# Altium PCB FPW1-0-2.PcbDoc (part 3 of 11)
Units mm, origin at the board's own origin, x right, y up, seen from the top; angles counter-clockwise.
Board outline 85 x 56 mm, 4 copper layers (Top Layer, GND_Plane, 3V3_Plane, Bottom Layer); 182 components, 321 nets, 1106 pads, 360 vias.
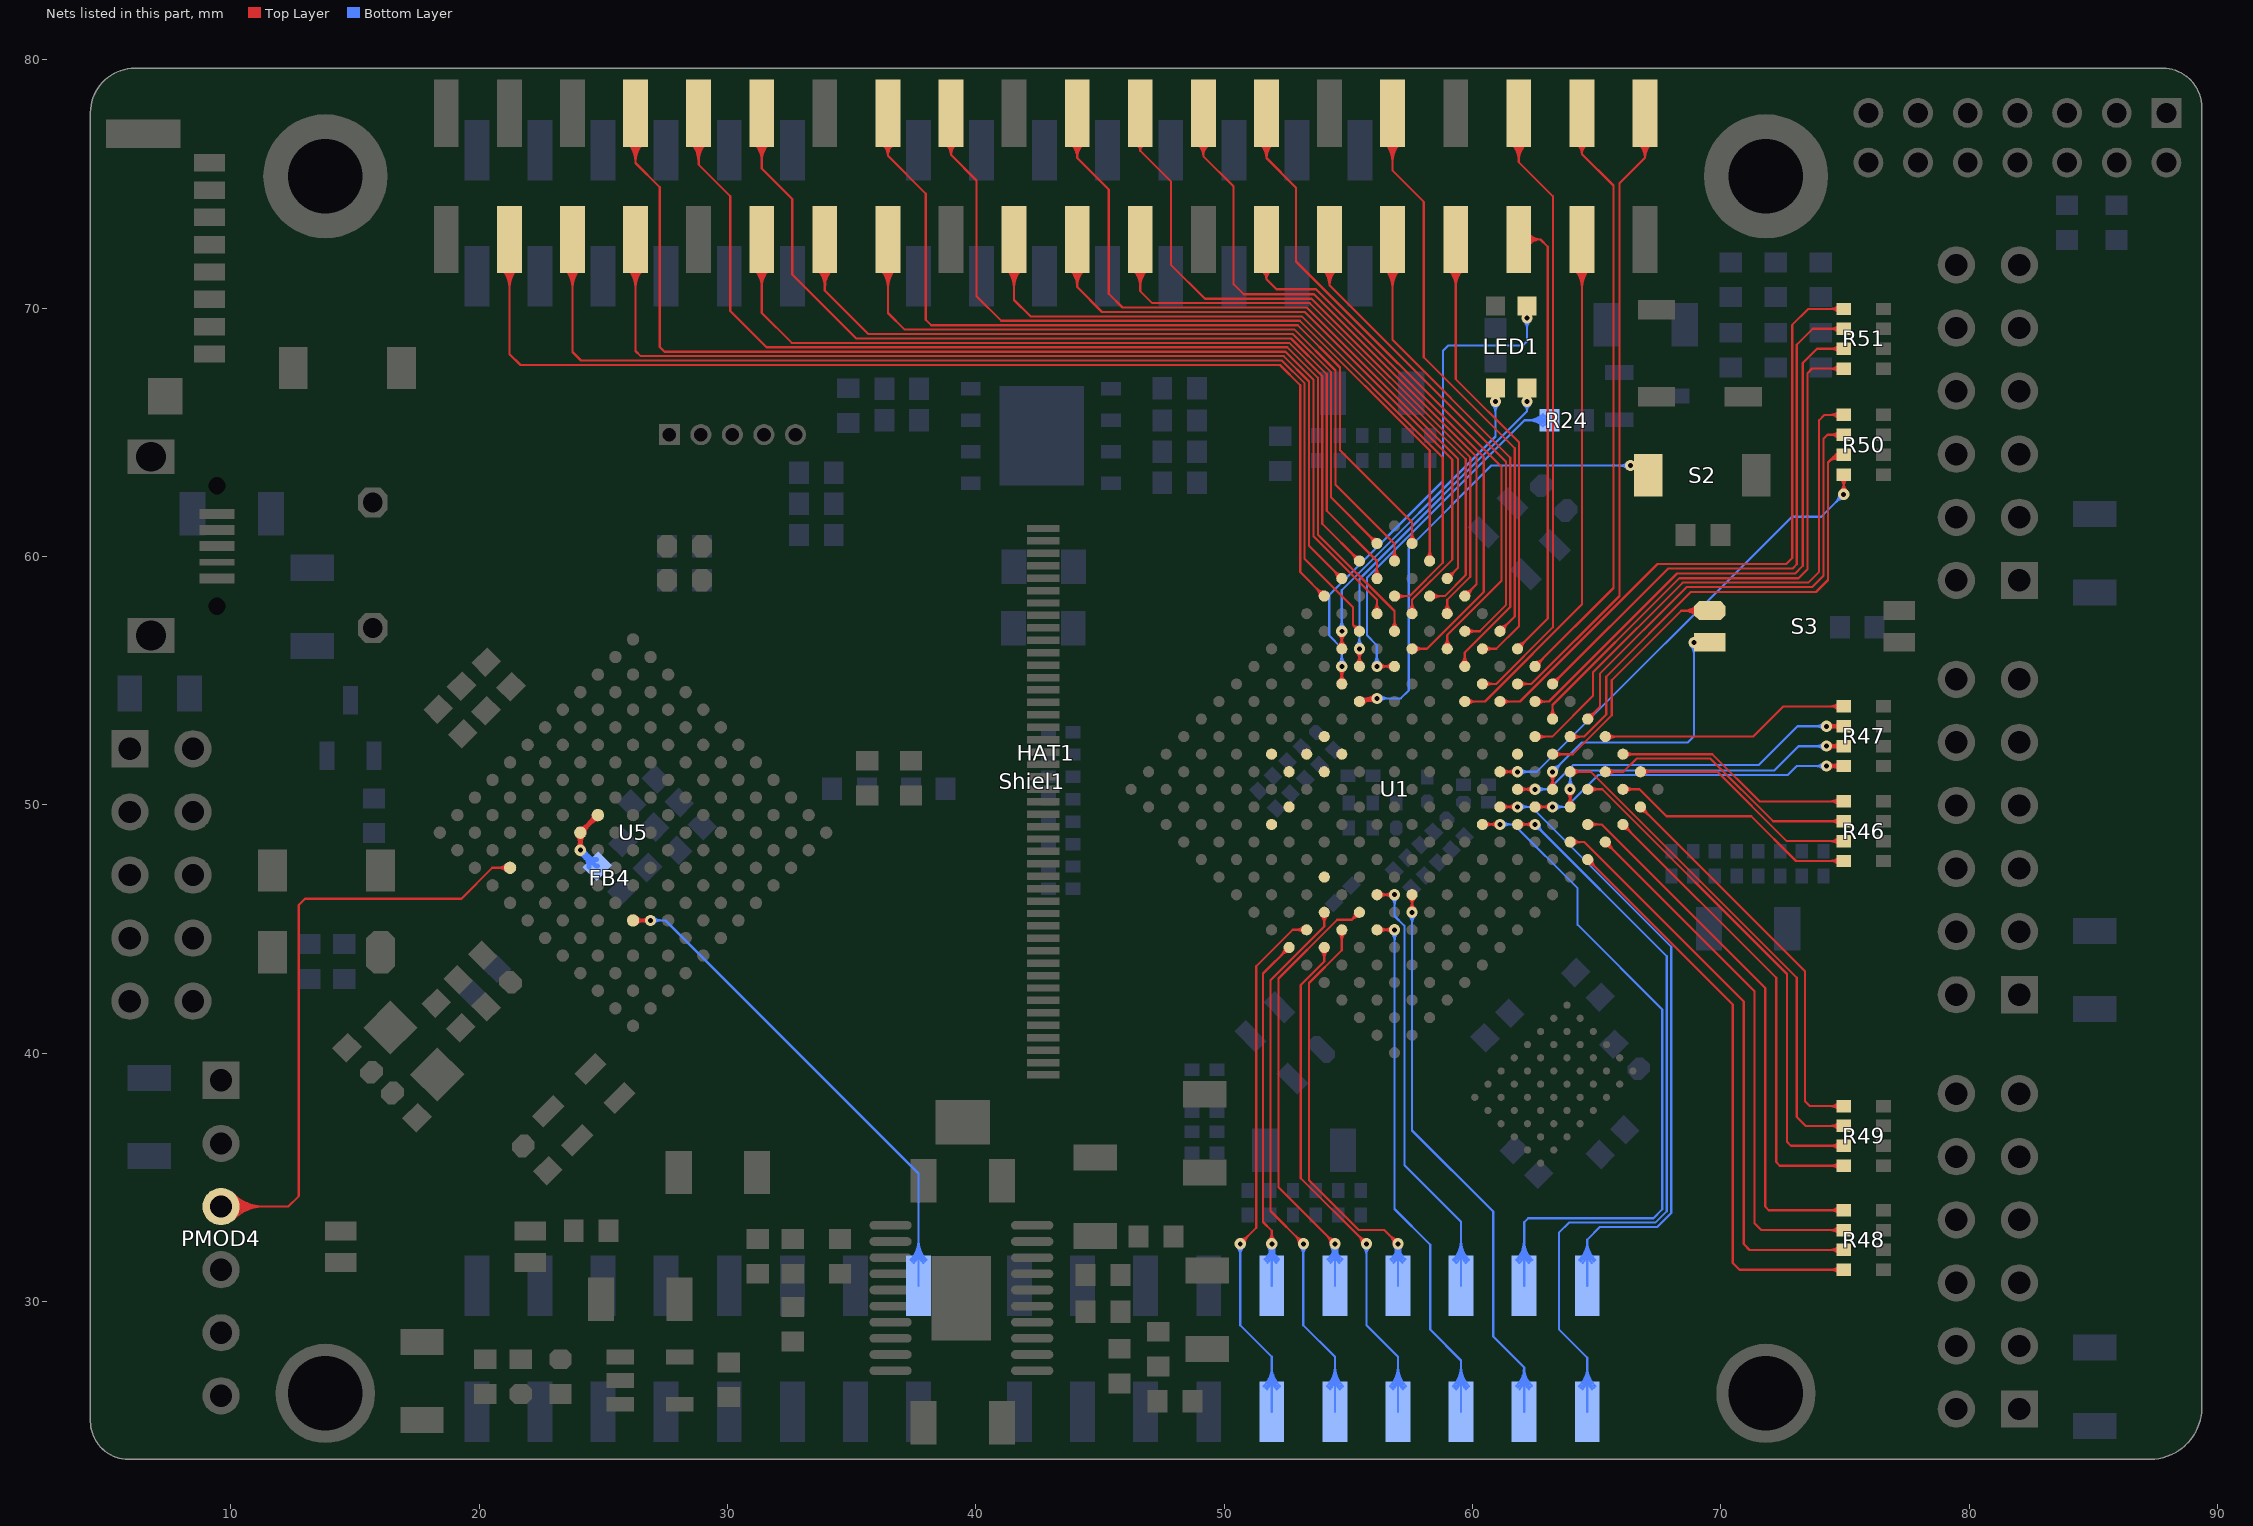
[diagram p5: the nets of this part, all layers, seen from the top]

## Via types
v1: diameter 0.45, hole 0.2, Top Layer to Bottom Layer, tented both sides, 280 vias
v2: diameter 0.61, hole 0.33, Top Layer to Bottom Layer, tented both sides, 40 vias
v3: diameter 0.403, hole 0.2, Top Layer to Bottom Layer, tented both sides, 15 vias
v4: diameter 0.5, hole 0.2, Top Layer to Bottom Layer, tented both sides, 12 vias
v5: diameter 0.864, hole 0.508, Top Layer to Bottom Layer, tented both sides, 11 vias
v6: diameter 0.864, hole 0.356, Top Layer to Bottom Layer, tented both sides, 1 vias
v7: diameter 0.864, hole 0.381, Top Layer to Bottom Layer, tented both sides, 1 vias

## Nets (pads, with @x,y where several pads share a name; then routed paths per layer and width w, separated by ;. In a path a pad name is that pad's centre, name@x,y a point inside that pad or via, vN(x,y) a via of type N, cw(c..) or ccw(c..) an arc to the next point about the centre after c; other vN are vias at no path point) (continued)
ANALOG13: PMOD4.3 U5.L4 | length 35.4
  Top Layer w0.089: PMOD4.3@9.614,33.833 12.319,33.833 12.738,34.252 12.738,45.974 12.992,46.228 19.291,46.228 20.536,47.473 U5.L4@21.25,47.473 ; PMOD4.3@9.861,33.585 cw(c10.459,32.988) 10.459,33.833 cw(c10.459,34.678) PMOD4.3@9.861,34.08 ; PMOD4.3@9.924,33.522 cw(c10.673,32.773) 10.673,33.833 cw(c10.673,34.892) PMOD4.3@9.924,34.143 ; PMOD4.3@9.987,33.46 cw(c10.888,32.559) 10.888,33.833 cw(c10.888,35.107) PMOD4.3@9.987,34.206 ; PMOD4.3@10.05,33.397 cw(c11.103,32.344) 11.103,33.833 cw(c11.103,35.322) PMOD4.3@10.05,34.269 ; PMOD4.3@10.113,33.334 cw(c11.317,32.129) 11.317,33.833 cw(c11.317,35.536) PMOD4.3@10.113,34.332 ; U5.L4@21.104,47.327 ccw(c20.753,46.976) 20.753,47.473 ccw(c20.753,47.969) U5.L4@21.104,47.618 ; U5.L4@21.167,47.39 ccw(c20.968,47.191) 20.968,47.473 ccw(c20.968,47.754) U5.L4@21.167,47.555
AVDD: FB4.2 U5.G5 U5.H5 | length 7.2
  Top Layer w0.203: U5.H5@23.973,48.782 cw(c23.72,48.529) 24.078,48.529 cw(c24.436,48.529) U5.H5@24.183,48.782 ; v1@23.991,48.267 ccw(c23.78,48.478) 24.078,48.478 ccw(c24.376,48.478) v1@24.165,48.267 ; v1(24.078,48.18) U5.H5@24.078,48.887 U5.G5@24.785,49.594 ; U5.H5@24.078,49.035 ccw(c24.078,49.393) 24.331,49.14 ccw(c24.585,48.887) U5.H5@24.226,48.887 ; U5.G5@24.637,49.594 cw(c24.278,49.594) 24.532,49.341 cw(c24.785,49.087) U5.G5@24.785,49.446
  Bottom Layer w0.203: v1@24.046,48.061 cw(c23.929,47.624) 24.321,47.85 ; v1@24.078,48.056 cw(c24.078,47.758) 24.289,47.969 cw(c24.499,48.18) v1@24.201,48.18 ; v1(24.078,48.18) 24.722,47.536 FB4.2@24.765,47.536 ; v1@24.197,48.212 ccw(c24.713,48.35) 24.446,47.887 ; v1@24.201,48.056 cw(c23.645,47.5) FB4.2@24.432,47.5 ; 24.267,47.991 ccw(c24.73,48.453) FB4.2@24.73,47.799
BANK14_IO1: S2.1 U1.K12 | length 23
  Top Layer w0.089: U1.K12@55.444,54.166 55.571,54.292 v1(56.147,54.292) ccw(c56.147,53.516) U1.K12@55.577,54.043 ; U1.K12@55.446,54.164 cw(c55.74,53.892) 55.74,54.292 ; U1.K12@55.511,54.104 cw(c55.943,53.704) v1@55.943,54.292 ; 55.753,54.244 cw(c55.819,53.983) v1@56.016,54.168 ; 55.829,54.264 ccw(c55.763,54.521) v1@55.992,54.385 ; 55.9,54.282 cw(c55.946,54.102) v1@56.08,54.229 ; v1@55.985,54.373 cw(c55.666,54.534) 55.758,54.188 cw(c55.851,53.843) v1@56.047,54.142 ; v1@56.019,54.165 ccw(c55.711,53.857) 55.711,54.292 ccw(c55.711,54.728) v1@56.019,54.42
  Bottom Layer w0.089: v1(56.147,54.292) 57.112,54.292 57.429,54.61 57.429,60.338 60.757,63.665 v1(66.358,63.665) ; v1@56.274,54.165 cw(c56.583,53.857) 56.583,54.292 cw(c56.583,54.728) v1@56.274,54.42 ; v1@66.23,63.537 ccw(c65.922,63.229) 65.922,63.665 ccw(c65.922,64.101) v1@66.23,63.793
BANK14_IO2: LED1.3 U1.L14 | length 15.3
  Top Layer w0.089: U1.L14@54.609,56.415 ccw(c54.301,56.723) 54.737,56.723 ccw(c55.173,56.723) U1.L14@54.865,56.415 ; v1@54.609,56.867 cw(c54.301,56.558) 54.737,56.558 cw(c55.173,56.558) v1@54.865,56.867 ; U1.L14@54.737,56.287 v1(54.737,56.994)
  Bottom Layer w0.089: v1@54.609,57.122 ccw(c54.301,57.43) 54.737,57.43 ccw(c55.173,57.43) v1@54.865,57.122 ; v1(54.737,56.994) 54.737,58.649 60.922,64.834 v1(60.922,66.243) ; v1@60.794,66.116 cw(c60.486,65.807) 60.922,65.807 cw(c61.358,65.807) v1@61.05,66.116
BANK14_IO3: HAT1.5 U1.M14 | length 50.1
  Top Layer w0.089: HAT1.5@23.44,71.599 cw(c22.662,70.821) 23.762,70.821 cw(c24.862,70.821) HAT1.5@24.084,71.599 ; HAT1.5@23.503,71.662 cw(c22.877,71.036) 23.762,71.036 cw(c24.647,71.036) HAT1.5@24.021,71.662 ; HAT1.5@23.565,71.725 cw(c23.091,71.25) 23.762,71.25 cw(c24.432,71.25) HAT1.5@23.958,71.725 ; HAT1.5@23.762,72.771 23.762,68.237 24.105,67.894 52.321,67.894 53.238,66.977 53.238,59.906 53.34,59.804 ; 53.34,59.817 53.34,59.804 ; U1.M14@55.265,57.017 ccw(c54.982,57.053) 55.184,57.255 ; U1.M14@55.421,57.173 cw(c55.385,57.456) 55.184,57.255 ; U1.M14@55.444,56.994 55.184,57.255 ; 53.34,59.804 55.184,57.961 55.184,57.255
BANK14_IO4: LED1.1 U1.K13 | length 22.7
  Top Layer w0.089: U1.K13@54.609,55.001 ccw(c54.301,55.309) 54.737,55.309 ccw(c55.173,55.309) U1.K13@54.865,55.001 ; v1@54.609,55.452 cw(c54.301,55.144) 54.737,55.144 cw(c55.173,55.144) v1@54.865,55.452 ; U1.K13@54.737,54.873 v1(54.737,55.58)
  Bottom Layer w0.089: v1@54.609,55.708 ccw(c54.301,56.016) 54.737,56.016 ccw(c55.173,56.016) v1@54.865,55.708 ; v1(54.737,55.58) 54.737,56.312 54.229,56.82 54.229,58.458 58.814,63.043 58.814,68.288 59.03,68.504 62.027,68.504 62.192,68.669 v1(62.192,69.609) ; v1@62.064,69.481 cw(c61.756,69.173) 62.192,69.173 cw(c62.628,69.173) v1@62.32,69.481
BANK14_IO5: LED1.4 U1.L13 | length 16.1
  Top Layer w0.089: U1.L13@55.316,55.708 ccw(c55.008,56.016) 55.444,56.016 ccw(c55.88,56.016) U1.L13@55.572,55.708 ; v1@55.316,56.16 cw(c55.008,55.851) 55.444,55.851 cw(c55.88,55.851) v1@55.572,56.16 ; U1.L13@55.444,55.58 v1(55.444,56.287)
  Bottom Layer w0.089: v1@55.316,56.415 ccw(c55.008,56.723) 55.444,56.723 ccw(c55.88,56.723) v1@55.572,56.415 ; v1(55.444,56.287) 55.444,59.099 62.192,65.847 ; v1@62.073,66.107 cw(c61.847,65.847) 62.192,65.847 ; v1(62.192,66.243) 62.192,65.847 ; v1@62.31,66.107 ccw(c62.536,65.847) 62.192,65.847
BANK14_IO6: R24.2 U1.M12 | length 19.5
  Top Layer w0.089: v1(56.147,55.58) U1.M12@56.858,55.58 ; v1@56.274,55.452 cw(c56.583,55.144) 56.583,55.58 cw(c56.583,56.016) v1@56.274,55.708 ; U1.M12@56.731,55.452 ccw(c56.422,55.144) 56.422,55.58 ccw(c56.422,56.016) U1.M12@56.731,55.708
  Bottom Layer w0.089: v1@56.019,55.708 ccw(c55.711,56.016) 56.147,56.016 ccw(c56.583,56.016) v1@56.274,55.708 ; v1(56.147,55.58) 56.147,56.434 55.75,56.83 55.75,59.154 62.09,65.494 R24.2@63.092,65.494 ; R24.2@62.841,65.242 ccw(c62.234,64.636) 62.234,65.494 ccw(c62.234,66.352) R24.2@62.841,65.745 ; R24.2@62.904,65.305 ccw(c62.448,64.85) 62.448,65.494 ccw(c62.448,66.138) R24.2@62.904,65.682 ; R24.2@62.966,65.368 ccw(c62.663,65.065) 62.663,65.494 ccw(c62.663,65.923) R24.2@62.966,65.62
BANK14_IO7: HAT1.3 U1.M16 | length 50.7
  Top Layer w0.089: HAT1.3@20.9,71.599 cw(c20.122,70.821) 21.222,70.821 cw(c22.322,70.821) HAT1.3@21.544,71.599 ; HAT1.3@20.963,71.662 cw(c20.337,71.036) 21.222,71.036 cw(c22.107,71.036) HAT1.3@21.481,71.662 ; HAT1.3@21.025,71.725 cw(c20.551,71.25) 21.222,71.25 cw(c21.892,71.25) HAT1.3@21.418,71.725 ; HAT1.3@21.222,72.771 21.222,68.161 21.666,67.716 52.248,67.716 53.061,66.904 53.061,59.378 U1.M16@54.03,58.409 ; U1.M16@53.849,58.409 ccw(c53.413,58.409) 53.722,58.717 ccw(c54.03,59.025) U1.M16@54.03,58.589
BANK14_IO8: HAT1.7 U1.N16 | length 45.5
  Top Layer w0.089: HAT1.7@25.98,71.599 cw(c25.202,70.821) 26.302,70.821 cw(c27.402,70.821) HAT1.7@26.624,71.599 ; HAT1.7@26.043,71.662 cw(c25.417,71.036) 26.302,71.036 cw(c27.187,71.036) HAT1.7@26.561,71.662 ; HAT1.7@26.105,71.725 cw(c25.631,71.25) 26.302,71.25 cw(c26.972,71.25) HAT1.7@26.498,71.725 ; HAT1.7@26.302,72.771 26.302,68.275 26.505,68.072 52.395,68.072 53.416,67.051 53.416,60.436 U1.N16@54.737,59.116 ; U1.N16@54.556,59.116 ccw(c54.121,59.116) 54.429,59.424 ccw(c54.737,59.732) U1.N16@54.737,59.296
BANK14_IO9: HAT1.12 U1.P15 | length 44.1
  Top Layer w0.089: HAT1.12@31.06,76.679 cw(c30.282,75.901) 31.382,75.901 cw(c32.482,75.901) HAT1.12@31.704,76.679 ; HAT1.12@31.123,76.742 cw(c30.497,76.116) 31.382,76.116 cw(c32.267,76.116) HAT1.12@31.641,76.742 ; HAT1.12@31.185,76.805 cw(c30.711,76.33) 31.382,76.33 cw(c32.052,76.33) HAT1.12@31.578,76.805 ; HAT1.12@31.382,77.851 31.382,75.628 32.614,74.397 32.614,71.361 35.192,68.783 52.69,68.783 54.127,67.345 54.127,61.849 56.151,59.825 U1.P15@56.151,59.116 ; U1.P15@56.024,59.243 ccw(c55.715,59.552) 56.151,59.552 ccw(c56.587,59.552) U1.P15@56.279,59.243
BANK14_IO10: HAT1.11 U1.P16 | length 39.5
  Top Layer w0.089: HAT1.11@31.06,71.599 cw(c30.282,70.821) 31.382,70.821 cw(c32.482,70.821) HAT1.11@31.704,71.599 ; HAT1.11@31.123,71.662 cw(c30.497,71.036) 31.382,71.036 cw(c32.267,71.036) HAT1.11@31.641,71.662 ; HAT1.11@31.185,71.725 cw(c30.711,71.25) 31.382,71.25 cw(c32.052,71.25) HAT1.11@31.578,71.725 ; HAT1.11@31.382,72.771 31.382,69.812 32.588,68.605 52.616,68.605 53.95,67.272 53.95,61.317 U1.P16@55.444,59.823 ; U1.P16@55.264,59.823 ccw(c54.828,59.823) 55.136,60.131 ccw(c55.444,60.439) U1.P16@55.444,60.003
BANK14_IO11: HAT1.15 U1.R15 | length 35.5
  Top Layer w0.089: HAT1.15@36.14,71.599 cw(c35.362,70.821) 36.462,70.821 cw(c37.562,70.821) HAT1.15@36.784,71.599 ; HAT1.15@36.203,71.662 cw(c35.577,71.036) 36.462,71.036 cw(c37.347,71.036) HAT1.15@36.721,71.662 ; HAT1.15@36.265,71.725 cw(c35.791,71.25) 36.462,71.25 cw(c37.132,71.25) HAT1.15@36.658,71.725 ; HAT1.15@36.462,72.771 36.462,69.812 37.135,69.139 52.837,69.139 54.483,67.493 54.483,62.89 56.858,60.515 U1.R15@56.858,59.823 ; U1.R15@56.731,59.95 ccw(c56.422,60.259) 56.858,60.259 ccw(c57.294,60.259) U1.R15@56.986,59.95
BANK14_IO12: HAT1.13 U1.R16 | length 36.3
  Top Layer w0.089: HAT1.13@33.6,71.599 cw(c32.822,70.821) 33.922,70.821 cw(c35.022,70.821) HAT1.13@34.244,71.599 ; HAT1.13@33.663,71.662 cw(c33.037,71.036) 33.922,71.036 cw(c34.807,71.036) HAT1.13@34.181,71.662 ; HAT1.13@33.725,71.725 cw(c33.251,71.25) 33.922,71.25 cw(c34.592,71.25) HAT1.13@34.118,71.725 ; HAT1.13@33.922,72.771 33.922,70.714 35.674,68.961 52.763,68.961 54.305,67.419 54.305,62.376 U1.R16@56.151,60.53 ; U1.R16@55.971,60.53 ccw(c55.535,60.53) 55.843,60.838 ccw(c56.151,61.146) U1.R16@56.151,60.71
BANK14_IO13: HAT1.18 U1.T14 | length 36.3
  Top Layer w0.089: HAT1.18@38.759,76.616 cw(c38.48,76.175) 39.002,76.175 ; HAT1.18@38.806,76.691 cw(c38.582,76.336) 39.002,76.336 cw(c39.422,76.336) HAT1.18@39.198,76.691 ; HAT1.18@38.853,76.766 cw(c38.684,76.497) 39.002,76.497 cw(c39.32,76.497) HAT1.18@39.15,76.766 ; HAT1.18@39.002,77.851 39.002,76.175 ; HAT1.18@39.245,76.616 ccw(c39.524,76.175) 39.002,76.175 ; U1.T14@58.145,59.95 ccw(c57.837,60.259) 58.273,60.259 ccw(c58.708,60.259) U1.T14@58.4,59.95 ; U1.T14@58.273,59.823 58.273,64.27 53.048,69.494 41.021,69.494 40.03,70.485 40.03,75.146 39.002,76.175
BANK14_IO14: HAT1.16 U1.T15 | length 38.2
  Top Layer w0.089: HAT1.16@36.204,76.625 cw(c35.869,76.136) 36.462,76.136 ; HAT1.16@36.254,76.699 cw(c35.985,76.305) 36.462,76.305 cw(c36.939,76.305) HAT1.16@36.669,76.699 ; HAT1.16@36.305,76.772 cw(c36.1,76.474) 36.462,76.474 cw(c36.823,76.474) HAT1.16@36.619,76.772 ; HAT1.16@36.462,77.851 36.462,76.136 ; HAT1.16@36.719,76.625 ccw(c37.054,76.136) 36.462,76.136 ; U1.T15@57.438,60.658 ccw(c57.13,60.966) 57.565,60.966 ccw(c58.001,60.966) U1.T15@57.693,60.658 ; U1.T15@57.565,60.53 57.565,61.383 54.661,64.287 54.661,67.615 52.959,69.317 38.202,69.317 37.986,69.532 37.986,74.612 36.462,76.136
BANK14_IO15: HAT1.10 U1.N13 | length 49.6
  Top Layer w0.089: HAT1.10@28.52,76.679 cw(c27.742,75.901) 28.842,75.901 cw(c29.942,75.901) HAT1.10@29.164,76.679 ; HAT1.10@28.583,76.742 cw(c27.957,76.116) 28.842,76.116 cw(c29.727,76.116) HAT1.10@29.101,76.742 ; HAT1.10@28.645,76.805 cw(c28.171,76.33) 28.842,76.33 cw(c29.512,76.33) HAT1.10@29.038,76.805 ; HAT1.10@28.842,77.851 28.842,75.781 30.112,74.511 30.112,69.888 31.572,68.428 52.542,68.428 53.772,67.198 53.772,60.893 56.858,57.806 U1.N13@56.858,56.994 ; U1.N13@56.731,57.122 ccw(c56.422,57.43) 56.858,57.43 ccw(c57.294,57.43) U1.N13@56.986,57.122
BANK14_IO16: HAT1.21 U1.P13 | length 31.4
  Top Layer w0.089: HAT1.21@43.767,71.592 cw(c43.058,70.853) 44.082,70.853 ; HAT1.21@43.828,71.656 cw(c43.258,71.062) 44.082,71.062 cw(c44.906,71.062) HAT1.21@44.336,71.656 ; HAT1.21@43.89,71.72 cw(c43.458,71.27) 44.082,71.27 cw(c44.706,71.27) HAT1.21@44.274,71.72 ; HAT1.21@44.082,72.771 44.082,70.853 ; HAT1.21@44.397,71.592 ccw(c45.105,70.853) 44.082,70.853 ; U1.P13@57.438,57.829 ccw(c57.13,58.137) 57.565,58.137 ccw(c58.001,58.137) U1.P13@57.693,57.829 ; U1.P13@57.565,57.701 57.565,58.262 59.182,59.879 59.182,63.906 53.238,69.85 45.085,69.85 44.082,70.853
BANK14_IO17: HAT1.8 U1.N14 | length 52
  Top Layer w0.089: HAT1.8@25.98,76.679 cw(c25.202,75.901) 26.302,75.901 cw(c27.402,75.901) HAT1.8@26.624,76.679 ; HAT1.8@26.043,76.742 cw(c25.417,76.116) 26.302,76.116 cw(c27.187,76.116) HAT1.8@26.561,76.742 ; HAT1.8@26.105,76.805 cw(c25.631,76.33) 26.302,76.33 cw(c26.972,76.33) HAT1.8@26.498,76.805 ; HAT1.8@26.302,77.851 26.302,75.844 27.28,74.867 27.28,68.44 27.47,68.25 52.469,68.25 53.594,67.125 53.594,60.819 56.151,58.262 U1.N14@56.151,57.701 ; U1.N14@56.024,57.829 ccw(c55.715,58.137) 56.151,58.137 ccw(c56.587,58.137) U1.N14@56.279,57.829
BANK14_IO18: HAT1.19 U1.P14 | length 33.9
  Top Layer w0.089: HAT1.19@41.22,71.599 cw(c40.442,70.821) 41.542,70.821 cw(c42.642,70.821) HAT1.19@41.864,71.599 ; HAT1.19@41.283,71.662 cw(c40.657,71.036) 41.542,71.036 cw(c42.427,71.036) HAT1.19@41.801,71.662 ; HAT1.19@41.345,71.725 cw(c40.871,71.25) 41.542,71.25 cw(c42.212,71.25) HAT1.19@41.738,71.725 ; HAT1.19@41.542,72.771 41.542,70.333 42.202,69.672 53.122,69.672 58.801,63.993 58.801,59.749 57.46,58.409 U1.P14@56.858,58.409 ; U1.P14@56.986,58.281 cw(c57.294,57.973) 57.294,58.409 cw(c57.294,58.844) U1.P14@56.986,58.536
BANK14_IO19: HAT1.27 U1.N12 | length 24.8
  Top Layer w0.089: HAT1.27@51.492,71.517 cw(c51.312,71.171) 51.702,71.171 ; HAT1.27@51.533,71.596 cw(c51.388,71.317) 51.702,71.317 cw(c52.016,71.317) HAT1.27@51.871,71.596 ; HAT1.27@51.702,72.771 51.702,71.171 ; HAT1.27@51.912,71.517 ccw(c52.092,71.171) 51.702,71.171 ; U1.N12@57.565,56.287 58.167,56.287 60.452,58.572 60.452,64.008 53.696,70.764 52.108,70.764 51.702,71.171 ; U1.N12@57.693,56.16 cw(c58.001,55.851) 58.001,56.287 cw(c58.001,56.723) U1.N12@57.693,56.415
BANK14_IO20: HAT1.31 U1.P10 | length 24.8
  Top Layer w0.089: HAT1.31@56.46,71.599 cw(c55.682,70.821) 56.782,70.821 cw(c57.882,70.821) HAT1.31@57.104,71.599 ; HAT1.31@56.523,71.662 cw(c55.897,71.036) 56.782,71.036 cw(c57.667,71.036) HAT1.31@57.041,71.662 ; HAT1.31@56.585,71.725 cw(c56.111,71.25) 56.782,71.25 cw(c57.452,71.25) HAT1.31@56.978,71.725 ; HAT1.31@56.782,72.771 56.782,68.718 61.519,63.981 61.519,57.973 59.687,56.141 U1.P10@59.687,55.58 ; U1.P10@59.559,55.708 ccw(c59.251,56.016) 59.687,56.016 ccw(c60.123,56.016) U1.P10@59.814,55.708
BANK14_IO21: HAT1.28 U1.P11 | length 30.4
  Top Layer w0.089: HAT1.28@51.416,76.647 cw(c50.932,76.048) 51.702,76.048 ; HAT1.28@51.471,76.716 cw(c51.082,76.234) 51.702,76.234 cw(c52.321,76.234) HAT1.28@51.932,76.716 ; HAT1.28@51.527,76.785 cw(c51.232,76.42) 51.702,76.42 cw(c52.171,76.42) HAT1.28@51.876,76.785 ; HAT1.28@51.702,77.851 51.702,76.048 ; HAT1.28@51.988,76.647 ccw(c52.472,76.048) 51.702,76.048 ; U1.P11@58.852,56.415 ccw(c58.544,56.723) 58.98,56.723 ccw(c59.416,56.723) U1.P11@59.107,56.415 ; U1.P11@58.98,56.287 58.98,56.848 61.163,59.031 61.163,63.614 52.895,71.882 52.895,74.854 51.702,76.048
BANK14_IO22: HAT1.24 U1.R12 | length 30.3
  Top Layer w0.089: HAT1.24@46.459,76.575 cw(c46.369,76.34) 46.622,76.34 ; HAT1.24@46.491,76.658 cw(c46.419,76.469) 46.622,76.469 cw(c46.825,76.469) HAT1.24@46.752,76.658 ; HAT1.24@46.622,77.851 46.622,76.34 ; HAT1.24@46.784,76.575 ccw(c46.874,76.34) 46.622,76.34 ; U1.R12@58.852,57.829 ccw(c58.544,58.137) 58.98,58.137 ccw(c59.416,58.137) U1.R12@59.107,57.829 ; U1.R12@58.98,57.701 58.98,58.262 59.906,59.188 59.906,63.995 53.518,70.383 49.225,70.383 47.854,71.755 47.854,75.108 46.622,76.34
BANK14_IO23: HAT1.26 U1.T12 | length 29.4
  Top Layer w0.089: HAT1.26@48.9,76.628 cw(c48.545,76.124) 49.162,76.124 ; HAT1.26@48.951,76.701 cw(c48.665,76.295) 49.162,76.295 cw(c49.658,76.295) HAT1.26@49.373,76.701 ; HAT1.26@49.002,76.774 cw(c48.786,76.466) 49.162,76.466 cw(c49.538,76.466) HAT1.26@49.322,76.774 ; HAT1.26@49.162,77.851 49.162,76.124 ; HAT1.26@49.424,76.628 ccw(c49.779,76.124) 49.162,76.124 ; U1.T12@59.687,58.409 60.16,58.882 60.16,64.021 53.619,70.561 50.787,70.561 50.381,70.968 50.381,74.905 49.162,76.124 ; U1.T12@59.687,58.589 ccw(c59.687,59.025) 59.995,58.717 ccw(c60.303,58.409) U1.T12@59.867,58.409
BANK14_IO24: HAT1.23 U1.R13 | length 29.3
  Top Layer w0.089: HAT1.23@46.3,71.599 cw(c45.522,70.821) 46.622,70.821 cw(c47.722,70.821) HAT1.23@46.944,71.599 ; HAT1.23@46.363,71.662 cw(c45.737,71.036) 46.622,71.036 cw(c47.507,71.036) HAT1.23@46.881,71.662 ; HAT1.23@46.425,71.725 cw(c45.951,71.25) 46.622,71.25 cw(c47.292,71.25) HAT1.23@46.818,71.725 ; HAT1.23@46.622,72.771 46.622,70.688 47.104,70.206 53.442,70.206 59.728,63.919 59.728,59.262 58.875,58.409 U1.R13@58.273,58.409 ; U1.R13@58.4,58.281 cw(c58.708,57.973) 58.708,58.409 cw(c58.708,58.844) U1.R13@58.4,58.536
BANK14_IO25: HAT1.22 U1.T13 | length 33.6
  Top Layer w0.089: HAT1.22@43.796,76.647 cw(c43.312,76.048) 44.082,76.048 ; HAT1.22@43.851,76.716 cw(c43.462,76.234) 44.082,76.234 cw(c44.701,76.234) HAT1.22@44.312,76.716 ; HAT1.22@43.907,76.785 cw(c43.612,76.42) 44.082,76.42 cw(c44.551,76.42) HAT1.22@44.256,76.785 ; HAT1.22@44.082,77.851 44.082,76.048 ; HAT1.22@44.368,76.647 ccw(c44.852,76.048) 44.082,76.048 ; U1.T13@58.98,59.116 59.411,59.547 59.411,63.944 53.327,70.028 45.91,70.028 45.352,70.587 45.352,74.778 44.082,76.048 ; U1.T13@58.98,59.296 ccw(c58.98,59.732) 59.288,59.424 ccw(c59.596,59.116) U1.T13@59.16,59.116
BANK14_IO26: HAT1.33 U1.R10 | length 23.3
  Top Layer w0.089: HAT1.33@59,71.599 cw(c58.222,70.821) 59.322,70.821 cw(c60.422,70.821) HAT1.33@59.644,71.599 ; HAT1.33@59.063,71.662 cw(c58.437,71.036) 59.322,71.036 cw(c60.207,71.036) HAT1.33@59.581,71.662 ; HAT1.33@59.125,71.725 cw(c58.651,71.25) 59.322,71.25 cw(c59.992,71.25) HAT1.33@59.518,71.725 ; HAT1.33@59.322,72.771 59.322,67.145 61.874,64.592 61.874,57.207 60.955,56.287 U1.R10@60.394,56.287 ; U1.R10@60.522,56.16 cw(c60.83,55.851) 60.83,56.287 cw(c60.83,56.723) U1.R10@60.522,56.415
BANK14_IO27: HAT1.29 U1.R11 | length 24
  Top Layer w0.089: HAT1.29@53.945,71.575 cw(c53.39,70.929) 54.242,70.929 ; HAT1.29@54.003,71.643 cw(c53.557,71.123) 54.242,71.123 cw(c54.927,71.123) HAT1.29@54.481,71.643 ; HAT1.29@54.061,71.71 cw(c53.723,71.316) 54.242,71.316 cw(c54.761,71.316) HAT1.29@54.423,71.71 ; HAT1.29@54.242,72.771 54.242,70.929 ; HAT1.29@54.539,71.575 ccw(c55.093,70.929) 54.242,70.929 ; U1.R11@59.687,56.994 60.289,56.994 61.341,58.046 61.341,63.83 54.242,70.929 ; U1.R11@59.814,56.867 cw(c60.123,56.558) 60.123,56.994 cw(c60.123,57.43) U1.R11@59.814,57.122
BANK14_IO28: HAT1.37 U1.N9 | length 25.9
  Top Layer w0.089: U1.N9@59.687,54.166 60.499,54.166 64.402,58.069 HAT1.37@64.402,72.771 ; U1.N9@59.814,54.038 cw(c60.123,53.73) 60.123,54.166 cw(c60.123,54.602) U1.N9@59.814,54.294 ; HAT1.37@64.08,71.599 cw(c63.302,70.821) 64.402,70.821 cw(c65.502,70.821) HAT1.37@64.724,71.599 ; HAT1.37@64.143,71.662 cw(c63.517,71.036) 64.402,71.036 cw(c65.287,71.036) HAT1.37@64.661,71.662 ; HAT1.37@64.205,71.725 cw(c63.731,71.25) 64.402,71.25 cw(c65.072,71.25) HAT1.37@64.598,71.725
BANK14_IO29: HAT1.36 U1.P9 | length 29.9
  Top Layer w0.089: U1.P9@60.394,54.873 60.955,54.873 63.233,57.152 63.233,74.511 61.862,75.882 HAT1.36@61.862,77.851 ; U1.P9@60.522,54.745 cw(c60.83,54.437) 60.83,54.873 cw(c60.83,55.309) U1.P9@60.522,55.001 ; HAT1.36@61.54,76.679 cw(c60.762,75.901) 61.862,75.901 cw(c62.962,75.901) HAT1.36@62.184,76.679 ; HAT1.36@61.603,76.742 cw(c60.977,76.116) 61.862,76.116 cw(c62.747,76.116) HAT1.36@62.121,76.742 ; HAT1.36@61.665,76.805 cw(c61.191,76.33) 61.862,76.33 cw(c62.532,76.33) HAT1.36@62.058,76.805
BANK14_IO30: R50.2 U1.M6 | length 23.9
  Top Layer w0.089: U1.M6@61.101,51.337 v1(61.808,51.337) ; U1.M6@61.229,51.21 cw(c61.537,50.902) 61.537,51.337 cw(c61.537,51.773) U1.M6@61.229,51.465 ; v1@61.68,51.21 ccw(c61.372,50.902) 61.372,51.337 ccw(c61.372,51.773) v1@61.68,51.465 ; R50.2@74.797,63.158 cw(c74.447,62.807) 74.943,62.807 cw(c75.439,62.807) R50.2@75.088,63.158 ; v1@74.815,62.637 ccw(c74.507,62.945) 74.943,62.945 ccw(c75.379,62.945) v1@75.07,62.637 ; R50.2@74.86,63.221 cw(c74.661,63.022) 74.943,63.022 cw(c75.224,63.022) R50.2@75.025,63.221 ; v1(74.943,62.509) R50.2@74.943,63.303
  Bottom Layer w0.089: v1(61.808,51.337) 62.59,51.337 72.86,61.608 74.041,61.608 v1(74.943,62.509) ; v1@61.936,51.21 cw(c62.244,50.902) 62.244,51.337 cw(c62.244,51.773) v1@61.936,51.465 ; v1@74.762,62.509 cw(c74.326,62.509) 74.635,62.201 cw(c74.943,61.893) v1@74.943,62.329
BANK14_IO31: U1.N6
BANK14_IO32: R51.8 U1.P8 | length 27.8
  Top Layer w0.089: U1.P8@61.101,54.166 61.913,54.166 67.45,59.703 72.631,59.703 72.873,59.944 72.873,69.329 73.514,69.971 R51.8@74.943,69.971 ; U1.P8@61.229,54.038 cw(c61.537,53.73) 61.537,54.166 cw(c61.537,54.602) U1.P8@61.229,54.294 ; R51.8@74.747,69.825 ccw(c74.397,69.474) 74.397,69.971 ccw(c74.397,70.467) R51.8@74.747,70.116 ; R51.8@74.81,69.888 ccw(c74.611,69.689) 74.611,69.971 ccw(c74.611,70.252) R51.8@74.81,70.053
BANK14_IO33: HAT1.40 U1.R8 | length 29.4
  Top Layer w0.089: U1.R8@61.808,54.873 62.369,54.873 65.913,58.417 65.913,75.032 66.942,76.06 ; U1.R8@61.936,54.745 cw(c62.244,54.437) 62.244,54.873 cw(c62.244,55.309) U1.R8@61.936,55.001 ; HAT1.40@66.659,76.644 cw(c66.199,76.06) 66.942,76.06 ; HAT1.40@66.714,76.713 cw(c66.344,76.244) 66.942,76.244 cw(c67.54,76.244) HAT1.40@67.169,76.713 ; HAT1.40@66.77,76.783 cw(c66.489,76.428) 66.942,76.428 cw(c67.395,76.428) HAT1.40@67.114,76.783 ; HAT1.40@66.942,77.851 66.942,76.06 ; HAT1.40@67.224,76.644 ccw(c67.685,76.06) 66.942,76.06
BANK14_IO34: R51.6 U1.T7 | length 24.7
  Top Layer w0.089: U1.T7@63.222,54.873 67.874,59.525 72.885,59.525 73.05,59.69 73.05,68.529 73.692,69.17 R51.6@74.943,69.17 ; U1.T7@63.222,55.054 ccw(c63.222,55.489) 63.53,55.181 ccw(c63.839,54.873) U1.T7@63.403,54.873 ; R51.6@74.747,69.025 ccw(c74.397,68.674) 74.397,69.17 ccw(c74.397,69.667) R51.6@74.747,69.316 ; R51.6@74.81,69.088 ccw(c74.611,68.889) 74.611,69.17 ccw(c74.611,69.452) R51.6@74.81,69.253
BANK14_IO35: HAT1.38 U1.T8 | length 26.5
  Top Layer w0.089: U1.T8@62.515,55.58 65.672,58.737 65.672,74.943 64.402,76.213 ; U1.T8@62.515,55.761 ccw(c62.515,56.197) 62.823,55.888 ccw(c63.132,55.58) U1.T8@62.696,55.58 ; HAT1.38@64.174,76.606 cw(c63.947,76.213) 64.402,76.213 ; HAT1.38@64.219,76.683 cw(c64.036,76.366) 64.402,76.366 cw(c64.767,76.366) HAT1.38@64.585,76.683 ; HAT1.38@64.402,77.851 64.402,76.213 ; HAT1.38@64.629,76.606 ccw(c64.856,76.213) 64.402,76.213
BANK14_IO36: HAT1.35 U1.T9 | length 21.5
  Top Layer w0.089: U1.T9@61.808,56.287 63.03,57.509 63.03,72.479 62.738,72.771 ; U1.T9@61.808,56.468 ccw(c61.808,56.904) 62.116,56.595 ccw(c62.424,56.287) U1.T9@61.989,56.287 ; HAT1.35@61.862,72.771 62.738,72.771 ; HAT1.35@62.089,72.611 cw(c62.396,72.396) 62.396,72.771 cw(c62.396,73.146) HAT1.35@62.089,72.931 ; HAT1.35@62.162,72.56 cw(c62.567,72.276) 62.567,72.771 cw(c62.567,73.266) HAT1.35@62.162,72.982 ; HAT1.35@62.235,72.509 cw(c62.738,72.156) 62.738,72.771 ; HAT1.35@62.235,73.033 ccw(c62.738,73.386) 62.738,72.771
BANK14_IO37: HAT1.32 U1.T10 | length 28
  Top Layer w0.089: HAT1.32@56.46,76.679 cw(c55.682,75.901) 56.782,75.901 cw(c57.882,75.901) HAT1.32@57.104,76.679 ; HAT1.32@56.523,76.742 cw(c55.897,76.116) 56.782,76.116 cw(c57.667,76.116) HAT1.32@57.041,76.742 ; HAT1.32@56.585,76.805 cw(c56.111,76.33) 56.782,76.33 cw(c57.452,76.33) HAT1.32@56.978,76.805 ; HAT1.32@56.782,77.851 56.782,75.54 58.039,74.282 58.039,68.021 61.697,64.364 61.697,57.59 U1.T10@61.101,56.994 ; U1.T10@61.101,57.175 ccw(c61.101,57.611) 61.409,57.303 ccw(c61.717,56.994) U1.T10@61.282,56.994
BANK14_IO38: R50.4 U1.R5 | length 22.1
  Top Layer w0.089: U1.R5@63.929,52.752 64.49,52.752 65.38,53.641 65.38,55.169 68.783,58.572 73.825,58.572 74.308,59.055 74.308,63.792 ; U1.R5@64.057,52.624 cw(c64.365,52.316) 64.365,52.752 cw(c64.365,53.188) U1.R5@64.057,52.879 ; 74.408,63.892 cw(c74.711,63.588) R50.4@74.854,63.993 ; 74.507,63.992 cw(c74.763,63.736) R50.4@74.884,64.077 ; 74.607,64.091 cw(c74.815,63.883) R50.4@74.913,64.161 ; R50.4@74.695,64.046 ccw(c74.619,64.024) 74.619,64.103 ; R50.4@74.695,64.161 cw(c74.619,64.183) 74.619,64.103 ; R50.4@74.824,63.909 ccw(c74.659,63.441) 74.308,63.792 ; R50.4@74.943,64.103 74.619,64.103 ; 74.308,63.792 74.619,64.103
BANK14_IO39: R50.6 U1.T5 | length 21
  Top Layer w0.089: U1.T5@64.636,53.459 65.126,53.948 65.126,55.283 68.618,58.776 73.673,58.776 74.13,59.233 74.13,64.745 74.289,64.903 R50.6@74.943,64.903 ; U1.T5@64.636,53.639 ccw(c64.636,54.075) 64.945,53.767 ccw(c65.253,53.459) U1.T5@64.817,53.459 ; R50.6@74.747,64.758 ccw(c74.397,64.407) 74.397,64.903 ccw(c74.397,65.4) R50.6@74.747,65.049 ; R50.6@74.81,64.821 ccw(c74.611,64.622) 74.611,64.903 ccw(c74.611,65.185) R50.6@74.81,64.986
BANK14_IO40: R51.2 U1.R6 | length 24.4
  Top Layer w0.089: U1.R6@63.095,53.586 ccw(c62.786,53.895) 63.222,53.895 ccw(c63.658,53.895) U1.R6@63.35,53.586 ; U1.R6@63.222,53.459 63.222,54.027 68.326,59.131 73.127,59.131 73.482,59.487 73.482,67.386 73.666,67.57 R51.2@74.943,67.57 ; R51.2@74.747,67.425 ccw(c74.397,67.074) 74.397,67.57 ccw(c74.397,68.067) R51.2@74.747,67.716 ; R51.2@74.81,67.488 ccw(c74.611,67.289) 74.611,67.57 ccw(c74.611,67.852) R51.2@74.81,67.653
BANK14_IO41: R51.4 U1.R7 | length 25
  Top Layer w0.089: U1.R7@62.515,54.166 63.076,54.166 68.232,59.322 72.987,59.322 73.292,59.627 73.292,67.793 73.87,68.371 R51.4@74.943,68.371 ; U1.R7@62.643,54.038 cw(c62.951,53.73) 62.951,54.166 cw(c62.951,54.602) U1.R7@62.643,54.294 ; R51.4@74.747,68.225 ccw(c74.397,67.874) 74.397,68.371 ccw(c74.397,68.867) R51.4@74.747,68.516 ; R51.4@74.81,68.288 ccw(c74.611,68.089) 74.611,68.371 ccw(c74.611,68.652) R51.4@74.81,68.453
BANK14_IO42: R50.8 U1.P6 | length 23.8
  Top Layer w0.089: U1.P6@62.515,52.752 63.204,52.752 64.843,54.391 64.843,55.331 68.466,58.953 73.52,58.953 73.952,59.385 73.952,65.494 74.162,65.703 R50.8@74.943,65.703 ; U1.P6@62.643,52.624 cw(c62.951,52.316) 62.951,52.752 cw(c62.951,53.188) U1.P6@62.643,52.879 ; R50.8@74.747,65.558 ccw(c74.397,65.207) 74.397,65.703 ccw(c74.397,66.2) R50.8@74.747,65.849 ; R50.8@74.81,65.621 ccw(c74.611,65.422) 74.611,65.703 ccw(c74.611,65.985) R50.8@74.81,65.786
BANK15_IO1: U1.D8
BANK15_IO2: U1.E11
BANK15_IO3: U1.D11
BANK15_IO4: U1.F12
BANK15_IO5: U1.F13
BANK15_IO6: U1.H11
BANK15_IO7: U1.G12
BANK15_IO8: U1.H12
BANK15_IO9: U1.G11
BANK34_IO1: Shiel1.64 U1.L5 | length 31.9
  Top Layer w0.089: U1.L5@61.101,49.923 v1(61.808,49.923) ; U1.L5@61.229,49.796 cw(c61.537,49.487) 61.537,49.923 cw(c61.537,50.359) U1.L5@61.229,50.051 ; v1@61.68,49.796 ccw(c61.372,49.487) 61.372,49.923 ccw(c61.372,50.359) v1@61.68,50.051
  Bottom Layer w0.089: v1(61.808,49.923) 62.369,49.923 67.996,44.296 67.996,33.571 67.432,33.007 65.126,33.007 64.618,32.499 Shiel1.64@64.618,30.645 ; v1@61.936,49.796 cw(c62.244,49.487) 62.244,49.923 cw(c62.244,50.359) v1@61.936,50.051 ; Shiel1.64@64.295,31.682 ccw(c63.518,32.46) 64.618,32.46 ccw(c65.717,32.46) Shiel1.64@64.94,31.682 ; Shiel1.64@64.358,31.619 ccw(c63.732,32.245) 64.618,32.245 ccw(c65.503,32.245) Shiel1.64@64.877,31.619 ; Shiel1.64@64.421,31.556 ccw(c63.947,32.031) 64.618,32.031 ccw(c65.288,32.031) Shiel1.64@64.814,31.556
BANK34_IO2: Shiel1.63 U1.L4 | length 37.1
  Top Layer w0.089: U1.L4@61.808,49.216 v1(62.515,49.216) ; U1.L4@61.936,49.089 cw(c62.244,48.78) 62.244,49.216 cw(c62.244,49.652) U1.L4@61.936,49.344 ; v1@62.388,49.089 ccw(c62.079,48.78) 62.079,49.216 ccw(c62.079,49.652) v1@62.388,49.344
  Bottom Layer w0.089: v1@62.515,49.036 cw(c62.515,48.6) 62.823,48.908 cw(c63.132,49.216) v1@62.696,49.216 ; v1(62.515,49.216) 67.818,43.913 67.818,33.645 67.358,33.185 63.881,33.185 63.475,32.779 63.475,28.892 64.618,27.749 Shiel1.63@64.618,25.565 ; Shiel1.63@64.295,26.602 ccw(c63.518,27.38) 64.618,27.38 ccw(c65.717,27.38) Shiel1.63@64.94,26.602 ; Shiel1.63@64.358,26.539 ccw(c63.732,27.165) 64.618,27.165 ccw(c65.503,27.165) Shiel1.63@64.877,26.539 ; Shiel1.63@64.421,26.476 ccw(c63.947,26.951) 64.618,26.951 ccw(c65.288,26.951) Shiel1.63@64.814,26.476
BANK34_IO3: R47.2 U1.M4 | length 18.6
  Top Layer w0.089: U1.M4@62.515,49.923 v1(63.222,49.923) ; U1.M4@62.643,49.796 cw(c62.951,49.487) 62.951,49.923 cw(c62.951,50.359) U1.M4@62.643,50.051 ; v1@63.095,49.796 ccw(c62.786,49.487) 62.786,49.923 ccw(c62.786,50.359) v1@63.095,50.051 ; v1(74.251,51.568) R47.2@74.943,51.568 ; v1@74.378,51.441 cw(c74.686,51.133) 74.686,51.568 cw(c74.686,52.004) v1@74.378,51.696 ; v1@74.392,51.456 cw(c74.534,51.343) 74.581,51.519 cw(c74.653,51.787) v1@74.409,51.655 ; v1@74.392,51.681 ccw(c74.534,51.794) 74.581,51.618 ccw(c74.653,51.35) v1@74.409,51.482 ; R47.2@74.747,51.423 ccw(c74.397,51.072) 74.397,51.568 ccw(c74.397,52.065) R47.2@74.747,51.714 ; R47.2@74.81,51.486 ccw(c74.611,51.287) 74.611,51.568 ccw(c74.611,51.85) R47.2@74.81,51.651
  Bottom Layer w0.089: v1(63.222,49.923) 63.783,49.923 65.066,51.206 72.695,51.206 73.057,51.568 v1(74.251,51.568) ; v1@63.35,49.796 cw(c63.658,49.487) 63.658,49.923 cw(c63.658,50.359) v1@63.35,50.051 ; v1@74.123,51.441 ccw(c73.815,51.133) 73.815,51.568 ccw(c73.815,52.004) v1@74.123,51.696
BANK34_IO4: R48.4 U1.M2 | length 25.4
  Top Layer w0.089: U1.M2@63.929,48.509 64.496,48.509 70.917,42.088 70.917,32.322 71.152,32.087 R48.4@74.943,32.087 ; U1.M2@64.057,48.381 cw(c64.365,48.073) 64.365,48.509 cw(c64.365,48.945) U1.M2@64.057,48.637 ; R48.4@74.747,31.941 ccw(c74.397,31.59) 74.397,32.087 ccw(c74.397,32.583) R48.4@74.747,32.232 ; R48.4@74.81,32.004 ccw(c74.611,31.805) 74.611,32.087 ccw(c74.611,32.368) R48.4@74.81,32.169
BANK34_IO5: R48.2 U1.M1 | length 25.1
  Top Layer w0.089: U1.M1@64.636,47.621 cw(c64.636,47.186) 64.945,47.494 cw(c65.253,47.802) U1.M1@64.817,47.802 ; U1.M1@64.636,47.802 70.472,41.966 70.472,31.559 70.745,31.287 R48.2@74.943,31.287 ; R48.2@74.747,31.141 ccw(c74.397,30.79) 74.397,31.287 ccw(c74.397,31.783) R48.2@74.747,31.432 ; R48.2@74.81,31.204 ccw(c74.611,31.005) 74.611,31.287 ccw(c74.611,31.568) R48.2@74.81,31.369
BANK34_IO6: R47.4 U1.N3 | length 18.3
  Top Layer w0.089: U1.N3@63.802,50.051 ccw(c63.494,50.359) 63.929,50.359 ccw(c64.365,50.359) U1.N3@64.057,50.051 ; v1@63.802,50.503 cw(c63.494,50.195) 63.929,50.195 cw(c64.365,50.195) v1@64.057,50.503 ; U1.N3@63.929,49.923 v1(63.929,50.63) ; v1(74.251,52.369) R47.4@74.943,52.369 ; v1@74.378,52.241 cw(c74.686,51.933) 74.686,52.369 cw(c74.686,52.804) v1@74.378,52.496 ; v1@74.392,52.256 cw(c74.534,52.143) 74.581,52.319 cw(c74.653,52.587) v1@74.409,52.455 ; v1@74.392,52.481 ccw(c74.534,52.594) 74.581,52.418 ccw(c74.653,52.15) v1@74.409,52.282 ; R47.4@74.747,52.223 ccw(c74.397,51.872) 74.397,52.369 ccw(c74.397,52.865) R47.4@74.747,52.514 ; R47.4@74.81,52.286 ccw(c74.611,52.087) 74.611,52.369 ccw(c74.611,52.65) R47.4@74.81,52.451
  Bottom Layer w0.089: v1@63.802,50.758 ccw(c63.494,51.066) 63.929,51.066 ccw(c64.365,51.066) v1@64.057,50.758 ; v1(63.929,50.63) 63.929,51.191 64.123,51.384 72.136,51.384 73.12,52.369 v1(74.251,52.369) ; v1@74.123,52.241 ccw(c73.815,51.933) 73.815,52.369 ccw(c73.815,52.804) v1@74.123,52.496
BANK34_IO7: R48.8 U1.N2 | length 23.8
  Top Layer w0.089: U1.N2@64.636,49.216 65.197,49.216 71.78,42.633 71.78,33.833 71.927,33.687 R48.8@74.943,33.687 ; U1.N2@64.764,49.089 cw(c65.072,48.78) 65.072,49.216 cw(c65.072,49.652) U1.N2@64.764,49.344 ; R48.8@74.747,33.541 ccw(c74.397,33.19) 74.397,33.687 ccw(c74.397,34.183) R48.8@74.747,33.832 ; R48.8@74.81,33.604 ccw(c74.611,33.405) 74.611,33.687 ccw(c74.611,33.968) R48.8@74.81,33.769
BANK34_IO8: R48.6 U1.N1 | length 23.5
  Top Layer w0.089: U1.N1@65.344,48.329 cw(c65.344,47.893) 65.652,48.201 cw(c65.96,48.509) U1.N1@65.524,48.509 ; U1.N1@65.344,48.509 71.349,42.504 71.349,33.16 71.622,32.887 R48.6@74.943,32.887 ; R48.6@74.747,32.741 ccw(c74.397,32.39) 74.397,32.887 ccw(c74.397,33.383) R48.6@74.747,33.032 ; R48.6@74.81,32.804 ccw(c74.611,32.605) 74.611,32.887 ccw(c74.611,33.168) R48.6@74.81,32.969
BANK34_IO9: R49.2 U1.P1 | length 20.8
  Top Layer w0.089: U1.P1@66.051,49.036 cw(c66.051,48.6) 66.359,48.908 cw(c66.667,49.216) U1.P1@66.231,49.216 ; U1.P1@66.051,49.216 72.225,43.042 72.225,35.623 72.371,35.478 R49.2@74.943,35.478 ; R49.2@74.747,35.332 ccw(c74.397,34.981) 74.397,35.478 ccw(c74.397,35.974) R49.2@74.747,35.623 ; R49.2@74.81,35.395 ccw(c74.611,35.196) 74.611,35.478 ccw(c74.611,35.759) R49.2@74.81,35.56
BANK34_IO10: R49.6 U1.P4 | length 22.1
  Top Layer w0.089: U1.P4@63.929,51.337 64.763,51.337 73.05,43.05 73.05,37.44 73.412,37.078 R49.6@74.943,37.078 ; U1.P4@64.057,51.21 cw(c64.365,50.902) 64.365,51.337 cw(c64.365,51.773) U1.P4@64.057,51.465 ; R49.6@74.747,36.932 ccw(c74.397,36.581) 74.397,37.078 ccw(c74.397,37.574) R49.6@74.747,37.223 ; R49.6@74.81,36.995 ccw(c74.611,36.796) 74.611,37.078 ccw(c74.611,37.359) R49.6@74.81,37.16
BANK34_IO11: R49.4 U1.P3 | length 22.1
  Top Layer w0.089: U1.P3@64.636,50.63 65.219,50.63 72.657,43.193 72.657,36.436 72.815,36.278 R49.4@74.943,36.278 ; U1.P3@64.764,50.503 cw(c65.072,50.195) 65.072,50.63 cw(c65.072,51.066) U1.P3@64.764,50.758 ; R49.4@74.747,36.132 ccw(c74.397,35.781) 74.397,36.278 ccw(c74.397,36.774) R49.4@74.747,36.423 ; R49.4@74.81,36.195 ccw(c74.611,35.996) 74.611,36.278 ccw(c74.611,36.559) R49.4@74.81,36.36
BANK34_IO12: R47.6 U1.M5 | length 19.7
  Top Layer w0.089: U1.M5@61.808,50.63 v1(62.515,50.63) ; U1.M5@61.936,50.503 cw(c62.244,50.195) 62.244,50.63 cw(c62.244,51.066) U1.M5@61.936,50.758 ; v1@62.388,50.503 ccw(c62.079,50.195) 62.079,50.63 ccw(c62.079,51.066) v1@62.388,50.758 ; v1(74.251,53.168) R47.6@74.943,53.168 ; v1@74.378,53.041 cw(c74.686,52.733) 74.686,53.168 cw(c74.686,53.604) v1@74.378,53.296 ; v1@74.392,53.056 cw(c74.534,52.943) 74.581,53.119 cw(c74.653,53.387) v1@74.409,53.255 ; v1@74.392,53.281 ccw(c74.534,53.394) 74.581,53.218 ccw(c74.653,52.95) v1@74.409,53.082 ; R47.6@74.747,53.023 ccw(c74.397,52.672) 74.397,53.168 ccw(c74.397,53.665) R47.6@74.747,53.314 ; R47.6@74.81,53.086 ccw(c74.611,52.887) 74.611,53.168 ccw(c74.611,53.45) R47.6@74.81,53.251
  Bottom Layer w0.089: v1(62.515,50.63) 63.076,50.63 64.058,51.613 71.526,51.613 73.082,53.168 v1(74.251,53.168) ; v1@62.643,50.503 cw(c62.951,50.195) 62.951,50.63 cw(c62.951,51.066) v1@62.643,50.758 ; v1@74.123,53.041 ccw(c73.815,52.733) 73.815,53.168 ccw(c73.815,53.604) v1@74.123,53.296
BANK34_IO13: S3.2 U1.N4 | length 13.5
  Top Layer w0.089: U1.N4@63.095,50.758 ccw(c62.786,51.066) 63.222,51.066 ccw(c63.658,51.066) U1.N4@63.35,50.758 ; v1@63.095,51.21 cw(c62.786,50.902) 63.222,50.902 cw(c63.658,50.902) v1@63.35,51.21 ; U1.N4@63.222,50.63 v1(63.222,51.337)
  Bottom Layer w0.089: v1(63.222,51.337) 64.399,52.514 68.669,52.514 68.91,52.756 v1(68.91,56.54) ; v1@63.222,51.518 ccw(c63.222,51.954) 63.53,51.646 ccw(c63.839,51.337) v1@63.403,51.337 ; v1@68.783,56.413 cw(c68.474,56.105) 68.91,56.105 cw(c69.346,56.105) v1@69.038,56.413
BANK34_IO14: R46.2 U1.R2 | length 12
  Top Layer w0.089: U1.R2@66.051,50.63 66.721,50.63 67.809,49.543 71.222,49.543 73.019,47.746 R46.2@74.943,47.746 ; U1.R2@66.178,50.503 cw(c66.487,50.195) 66.487,50.63 cw(c66.487,51.066) U1.R2@66.178,50.758 ; R46.2@74.747,47.6 ccw(c74.397,47.25) 74.397,47.746 ccw(c74.397,48.242) R46.2@74.747,47.891 ; R46.2@74.81,47.663 ccw(c74.611,47.464) 74.611,47.746 ccw(c74.611,48.027) R46.2@74.81,47.828
BANK34_IO15: R49.8 U1.R1 | length 18.1
  Top Layer w0.089: U1.R1@66.758,49.743 cw(c66.758,49.307) 67.066,49.615 cw(c67.374,49.923) U1.R1@66.938,49.923 ; U1.R1@66.758,49.923 73.381,43.3 73.381,38.075 73.578,37.878 R49.8@74.943,37.878 ; R49.8@74.747,37.732 ccw(c74.397,37.381) 74.397,37.878 ccw(c74.397,38.374) R49.8@74.747,38.023 ; R49.8@74.81,37.795 ccw(c74.611,37.596) 74.611,37.878 ccw(c74.611,38.159) R49.8@74.81,37.96
BANK34_IO16: R46.6 U1.R3 | length 12.8
  Top Layer w0.089: U1.R3@65.344,51.337 66.069,51.337 66.599,51.867 69.581,51.867 72.102,49.346 R46.6@74.943,49.346 ; U1.R3@65.471,51.21 cw(c65.779,50.902) 65.779,51.337 cw(c65.779,51.773) U1.R3@65.471,51.465 ; R46.6@74.747,49.2 ccw(c74.397,48.85) 74.397,49.346 ccw(c74.397,49.842) R46.6@74.747,49.491 ; R46.6@74.81,49.263 ccw(c74.611,49.064) 74.611,49.346 ccw(c74.611,49.627) R46.6@74.81,49.428
BANK34_IO17: R46.4 U1.T2 | length 11.2
  Top Layer w0.089: U1.T2@66.758,51.337 69.859,51.337 72.65,48.546 R46.4@74.943,48.546 ; U1.T2@66.885,51.21 cw(c67.194,50.902) 67.194,51.337 cw(c67.194,51.773) U1.T2@66.885,51.465 ; R46.4@74.747,48.4 ccw(c74.397,48.05) 74.397,48.546 ccw(c74.397,49.042) R46.4@74.747,48.691 ; R46.4@74.81,48.463 ccw(c74.611,48.264) 74.611,48.546 ccw(c74.611,48.827) R46.4@74.81,48.628
BANK34_IO18: R47.8 U1.T4 | length 12
  Top Layer w0.089: U1.T4@65.344,52.752 71.294,52.752 72.511,53.969 R47.8@74.943,53.969 ; U1.T4@65.471,52.624 cw(c65.779,52.316) 65.779,52.752 cw(c65.779,53.188) U1.T4@65.471,52.879 ; R47.8@74.747,53.823 ccw(c74.397,53.472) 74.397,53.969 ccw(c74.397,54.465) R47.8@74.747,54.114 ; R47.8@74.81,53.886 ccw(c74.611,53.687) 74.611,53.969 ccw(c74.611,54.25) R47.8@74.81,54.051
BANK34_IO19: R46.8 U1.T3 | length 11.6
  Top Layer w0.089: U1.T3@66.051,52.045 69.654,52.045 71.553,50.146 R46.8@74.943,50.146 ; U1.T3@66.178,51.917 cw(c66.487,51.609) 66.487,52.045 cw(c66.487,52.48) U1.T3@66.178,52.172 ; R46.8@74.747,50 ccw(c74.397,49.65) 74.397,50.146 ccw(c74.397,50.642) R46.8@74.747,50.291 ; R46.8@74.81,50.063 ccw(c74.611,49.864) 74.611,50.146 ccw(c74.611,50.427) R46.8@74.81,50.228
BANK34_IO20: S3.1 U1.P5 | length 13
  Top Layer w0.089: U1.P5@63.222,52.045 64.034,52.045 65.602,53.612 65.602,55.023 68.402,57.823 S3.1@69.558,57.823 ; U1.P5@63.35,51.917 cw(c63.658,51.609) 63.658,52.045 cw(c63.658,52.48) U1.P5@63.35,52.172 ; S3.1@69.066,57.586 ccw(c68.493,57.013) 68.493,57.823 ccw(c68.493,58.633) S3.1@69.066,58.06 ; S3.1@69.128,57.649 ccw(c68.707,57.228) 68.707,57.823 ccw(c68.707,58.419) S3.1@69.128,57.998 ; S3.1@69.191,57.712 ccw(c68.922,57.442) 68.922,57.823 ccw(c68.922,58.204) S3.1@69.191,57.935
BANK35_IO1: Shiel1.60 U1.E6 | length 23.8
  Top Layer w0.089: U1.E6@56.151,46.388 v1(56.858,46.388) ; U1.E6@56.279,46.26 cw(c56.587,45.952) 56.587,46.388 cw(c56.587,46.824) U1.E6@56.279,46.515 ; v1@56.731,46.26 ccw(c56.422,45.952) 56.422,46.388 ccw(c56.422,46.824) v1@56.731,46.515
  Bottom Layer w0.089: v1@56.731,46.26 cw(c56.422,45.952) 56.858,45.952 cw(c57.294,45.952) v1@56.986,46.26 ; v1(56.858,46.388) 56.858,45.534 57.255,45.138 57.255,35.506 59.538,33.223 Shiel1.60@59.538,30.645 ; Shiel1.60@59.215,31.682 ccw(c58.438,32.46) 59.538,32.46 ccw(c60.637,32.46) Shiel1.60@59.86,31.682 ; Shiel1.60@59.278,31.619 ccw(c58.652,32.245) 59.538,32.245 ccw(c60.423,32.245) Shiel1.60@59.797,31.619 ; Shiel1.60@59.341,31.556 ccw(c58.867,32.031) 59.538,32.031 ccw(c60.208,32.031) Shiel1.60@59.734,31.556
BANK35_IO2: Shiel1.53 U1.B7 | length 27.6
  Top Layer w0.089: v1(50.648,32.334) 51.295,32.982 51.295,43.507 52.762,44.974 U1.B7@53.323,44.974 ; v1@50.648,32.515 ccw(c50.648,32.951) 50.956,32.642 ccw(c51.264,32.334) v1@50.828,32.334 ; U1.B7@53.195,44.846 ccw(c52.887,44.538) 52.887,44.974 ccw(c52.887,45.409) U1.B7@53.195,45.101
  Bottom Layer w0.089: v1@50.52,32.207 cw(c50.212,31.898) 50.648,31.898 cw(c51.083,31.898) v1@50.775,32.207 ; v1(50.648,32.334) 50.648,29.058 51.918,27.788 Shiel1.53@51.918,25.565 ; Shiel1.53@51.595,26.602 ccw(c50.818,27.38) 51.918,27.38 ccw(c53.017,27.38) Shiel1.53@52.24,26.602 ; Shiel1.53@51.658,26.539 ccw(c51.032,27.165) 51.918,27.165 ccw(c52.803,27.165) Shiel1.53@52.177,26.539 ; Shiel1.53@51.721,26.476 ccw(c51.247,26.951) 51.918,26.951 ccw(c52.588,26.951) Shiel1.53@52.114,26.476
BANK35_IO3: Shiel1.54 U1.A7 | length 22.4
  Top Layer w0.089: v1@51.79,32.462 ccw(c51.482,32.77) 51.918,32.77 ccw(c52.353,32.77) v1@52.045,32.462 ; v1(51.918,32.334) 51.918,32.855 51.562,33.21 51.562,43.213 U1.A7@52.616,44.266 ; U1.A7@52.435,44.266 cw(c51.999,44.266) 52.307,43.958 cw(c52.616,43.65) U1.A7@52.616,44.086
  Bottom Layer w0.089: Shiel1.54@51.626,31.71 ccw(c51.104,32.334) v1(51.918,32.334) ; Shiel1.54@51.683,31.642 ccw(c51.263,32.144) 51.918,32.144 ccw(c52.572,32.144) Shiel1.54@52.153,31.642 ; Shiel1.54@51.74,31.573 ccw(c51.422,31.954) 51.918,31.954 ccw(c52.414,31.954) Shiel1.54@52.096,31.573 ; v1@51.764,32.24 cw(c51.421,32.031) 51.809,31.927 cw(c52.196,31.824) v1@52.004,32.176 ; v1@51.79,32.207 cw(c51.482,31.898) 51.918,31.898 cw(c52.353,31.898) v1@52.045,32.207 ; v1@51.791,32.206 cw(c51.589,32.002) 51.868,31.936 ; v1@51.823,32.181 cw(c51.672,31.937) 51.951,32.003 ; v1@51.831,32.176 cw(c51.639,31.824) 52.027,31.927 cw(c52.414,32.031) v1@52.072,32.24 ; v1@51.853,32.269 cw(c51.719,32.133) 51.905,32.09 ; 51.884,32.003 cw(c52.163,31.937) v1@52.012,32.181 ; Shiel1.54@51.918,30.645 v1(51.918,32.334) ; 51.931,32.09 cw(c52.116,32.133) v1@51.982,32.269 ; 51.967,31.936 cw(c52.246,32.002) v1@52.045,32.206 ; Shiel1.54@52.21,31.71 cw(c52.731,32.334) v1(51.918,32.334)
BANK35_IO4: Shiel1.57 U1.B6 | length 26.9
  Top Layer w0.089: U1.B6@53.902,44.139 cw(c53.594,43.831) 54.03,43.831 cw(c54.466,43.831) U1.B6@54.158,44.139 ; U1.B6@54.03,44.266 54.03,43.7 53.086,42.756 53.086,34.976 v1(55.728,32.334) ; v1@55.547,32.334 ccw(c55.111,32.334) 55.419,32.642 ccw(c55.728,32.951) v1@55.728,32.515
  Bottom Layer w0.089: v1@55.6,32.207 cw(c55.292,31.898) 55.728,31.898 cw(c56.163,31.898) v1@55.855,32.207 ; v1(55.728,32.334) 55.728,29.058 56.998,27.788 Shiel1.57@56.998,25.565 ; Shiel1.57@56.675,26.602 ccw(c55.898,27.38) 56.998,27.38 ccw(c58.097,27.38) Shiel1.57@57.32,26.602 ; Shiel1.57@56.738,26.539 ccw(c56.112,27.165) 56.998,27.165 ccw(c57.883,27.165) Shiel1.57@57.257,26.539 ; Shiel1.57@56.801,26.476 ccw(c56.327,26.951) 56.998,26.951 ccw(c57.668,26.951) Shiel1.57@57.194,26.476
BANK35_IO5: Shiel1.55 U1.C7 | length 28.3
  Top Layer w0.089: v1@53.007,32.334 ccw(c52.571,32.334) 52.879,32.642 ccw(c53.188,32.951) v1@53.188,32.515 ; v1(53.188,32.334) 51.867,33.655 51.867,42.946 54.03,45.11 U1.C7@54.03,45.681 ; U1.C7@53.902,45.553 cw(c53.594,45.245) 54.03,45.245 cw(c54.466,45.245) U1.C7@54.158,45.553
  Bottom Layer w0.089: v1@53.06,32.207 cw(c52.752,31.898) 53.188,31.898 cw(c53.623,31.898) v1@53.315,32.207 ; v1(53.188,32.334) 53.188,29.058 54.458,27.788 Shiel1.55@54.458,25.565 ; Shiel1.55@54.135,26.602 ccw(c53.358,27.38) 54.458,27.38 ccw(c55.557,27.38) Shiel1.55@54.78,26.602 ; Shiel1.55@54.198,26.539 ccw(c53.572,27.165) 54.458,27.165 ccw(c55.343,27.165) Shiel1.55@54.717,26.539 ; Shiel1.55@54.261,26.476 ccw(c53.787,26.951) 54.458,26.951 ccw(c55.128,26.951) Shiel1.55@54.654,26.476
BANK35_IO6: Shiel1.58 U1.C6 | length 25.2
  Top Layer w0.089: U1.C6@54.609,44.846 cw(c54.301,44.538) 54.737,44.538 cw(c55.173,44.538) U1.C6@54.865,44.846 ; U1.C6@54.737,44.974 54.737,44.156 53.416,42.835 53.416,34.897 55.42,32.893 56.439,32.893 v1(56.998,32.334) ; v1@56.817,32.334 ccw(c56.381,32.334) 56.689,32.642 ccw(c56.998,32.951) v1@56.998,32.515
  Bottom Layer w0.089: Shiel1.58@56.706,31.71 ccw(c56.184,32.334) v1(56.998,32.334) ; Shiel1.58@56.763,31.641 ccw(c56.343,32.144) 56.998,32.144 ccw(c57.652,32.144) Shiel1.58@57.233,31.641 ; Shiel1.58@56.82,31.573 ccw(c56.502,31.954) 56.998,31.954 ccw(c57.494,31.954) Shiel1.58@57.176,31.573 ; v1@56.844,32.24 cw(c56.501,32.031) 56.889,31.927 cw(c57.276,31.824) v1@57.084,32.176 ; v1@56.87,32.207 cw(c56.562,31.898) 56.998,31.898 cw(c57.433,31.898) v1@57.125,32.207 ; v1@56.871,32.206 cw(c56.669,32.002) 56.948,31.936 ; v1@56.903,32.181 cw(c56.752,31.937) 57.031,32.003 ; v1@56.911,32.176 cw(c56.719,31.824) 57.107,31.927 cw(c57.494,32.031) v1@57.152,32.24 ; v1@56.933,32.269 cw(c56.799,32.133) 56.985,32.09 ; 56.964,32.003 cw(c57.243,31.937) v1@57.092,32.181 ; Shiel1.58@56.998,30.645 v1(56.998,32.334) ; 57.011,32.09 cw(c57.196,32.133) v1@57.062,32.269 ; 57.047,31.936 cw(c57.326,32.002) v1@57.125,32.206 ; Shiel1.58@57.29,31.71 cw(c57.811,32.334) v1(56.998,32.334)
BANK35_IO7: Shiel1.56 U1.D6 | length 25.9
  Top Layer w0.089: v1@54.277,32.334 ccw(c53.841,32.334) 54.149,32.642 ccw(c54.458,32.951) v1@54.458,32.515 ; v1(54.458,32.334) 52.184,34.608 52.184,43.013 54.549,45.377 55.141,45.377 ; U1.D6@55.264,45.679 cw(c54.844,45.674) 55.141,45.377 ; U1.D6@55.442,45.5 ccw(c55.438,45.08) 55.141,45.377 ; U1.D6@55.444,45.681 55.141,45.377
  Bottom Layer w0.089: Shiel1.56@54.166,31.71 ccw(c53.644,32.334) v1(54.458,32.334) ; Shiel1.56@54.223,31.641 ccw(c53.803,32.144) 54.458,32.144 ccw(c55.112,32.144) Shiel1.56@54.693,31.641 ; Shiel1.56@54.28,31.573 ccw(c53.962,31.954) 54.458,31.954 ccw(c54.954,31.954) Shiel1.56@54.636,31.573 ; v1@54.304,32.24 cw(c53.961,32.031) 54.349,31.927 cw(c54.736,31.824) v1@54.544,32.176 ; v1@54.33,32.207 cw(c54.022,31.898) 54.458,31.898 cw(c54.893,31.898) v1@54.585,32.207 ; v1@54.331,32.206 cw(c54.129,32.002) 54.408,31.936 ; v1@54.363,32.181 cw(c54.212,31.937) 54.491,32.003 ; v1@54.371,32.176 cw(c54.179,31.824) 54.567,31.927 cw(c54.954,32.031) v1@54.612,32.24 ; v1@54.393,32.269 cw(c54.259,32.133) 54.445,32.09 ; 54.424,32.003 cw(c54.703,31.937) v1@54.552,32.181 ; Shiel1.56@54.458,30.645 v1(54.458,32.334) ; 54.471,32.09 cw(c54.656,32.133) v1@54.522,32.269 ; 54.507,31.936 cw(c54.786,32.002) v1@54.585,32.206 ; Shiel1.56@54.75,31.71 cw(c55.271,32.334) v1(54.458,32.334)
BANK35_IO8: Shiel1.59 U1.D5 | length 27.5
  Top Layer w0.089: U1.D5@56.151,44.974 v1(56.858,44.974) ; U1.D5@56.279,44.846 cw(c56.587,44.538) 56.587,44.974 cw(c56.587,45.409) U1.D5@56.279,45.101 ; v1@56.731,44.846 ccw(c56.422,44.538) 56.422,44.974 ccw(c56.422,45.409) v1@56.731,45.101
  Bottom Layer w0.089: v1@56.731,44.846 cw(c56.422,44.538) 56.858,44.538 cw(c57.294,44.538) v1@56.986,44.846 ; v1(56.858,44.974) 56.858,33.731 58.293,32.297 58.293,28.88 59.538,27.635 Shiel1.59@59.538,25.565 ; Shiel1.59@59.215,26.602 ccw(c58.438,27.38) 59.538,27.38 ccw(c60.637,27.38) Shiel1.59@59.86,26.602 ; Shiel1.59@59.278,26.539 ccw(c58.652,27.165) 59.538,27.165 ccw(c60.423,27.165) Shiel1.59@59.797,26.539 ; Shiel1.59@59.341,26.476 ccw(c58.867,26.951) 59.538,26.951 ccw(c60.208,26.951) Shiel1.59@59.734,26.476
BANK35_IO9: Shiel1.61 U1.F5 | length 28.8
  Top Layer w0.089: v1@57.438,45.808 ccw(c57.13,46.117) 57.565,46.117 ccw(c58.001,46.117) v1@57.693,45.808 ; U1.F5@57.438,46.26 cw(c57.13,45.952) 57.565,45.952 cw(c58.001,45.952) U1.F5@57.693,46.26 ; v1(57.565,45.681) U1.F5@57.565,46.388
  Bottom Layer w0.089: v1@57.438,45.553 cw(c57.13,45.245) 57.565,45.245 cw(c58.001,45.245) v1@57.693,45.553 ; v1(57.565,45.681) 57.565,36.897 60.833,33.63 60.833,28.6 62.078,27.356 ; Shiel1.61@61.761,26.607 ccw(c61.036,27.356) 62.078,27.356 ; Shiel1.61@61.822,26.543 ccw(c61.239,27.146) 62.078,27.146 ccw(c62.916,27.146) Shiel1.61@62.333,26.543 ; Shiel1.61@61.884,26.48 ccw(c61.442,26.936) 62.078,26.936 ccw(c62.713,26.936) Shiel1.61@62.271,26.48 ; Shiel1.61@62.078,25.565 62.078,27.356 ; Shiel1.61@62.395,26.607 cw(c63.12,27.356) 62.078,27.356
BANK35_IO10: Shiel1.62 U1.K5 | length 33.8
  Top Layer w0.089: U1.K5@60.394,49.216 v1(61.101,49.216) ; U1.K5@60.522,49.089 cw(c60.83,48.78) 60.83,49.216 cw(c60.83,49.652) U1.K5@60.522,49.344 ; v1@60.973,49.089 ccw(c60.665,48.78) 60.665,49.216 ccw(c60.665,49.652) v1@60.973,49.344
  Bottom Layer w0.089: v1(61.101,49.216) 61.662,49.216 64.23,46.648 64.23,45.18 67.64,41.77 67.64,33.718 67.285,33.363 62.243,33.363 62.078,33.198 Shiel1.62@62.078,30.645 ; v1@61.229,49.089 cw(c61.537,48.78) 61.537,49.216 cw(c61.537,49.652) v1@61.229,49.344 ; Shiel1.62@61.755,31.682 ccw(c60.978,32.46) 62.078,32.46 ccw(c63.177,32.46) Shiel1.62@62.4,31.682 ; Shiel1.62@61.818,31.619 ccw(c61.192,32.245) 62.078,32.245 ccw(c62.963,32.245) Shiel1.62@62.337,31.619 ; Shiel1.62@61.881,31.556 ccw(c61.407,32.031) 62.078,32.031 ccw(c62.748,32.031) Shiel1.62@62.274,31.556
CAN0_RX: Shiel1.44 U5.J9 | length 28.3
  Top Layer w0.089: U5.J9@26.199,45.351 v1(26.906,45.351) ; U5.J9@26.282,45.269 cw(c26.481,45.07) 26.481,45.351 cw(c26.481,45.633) U5.J9@26.282,45.434 ; U5.J9@26.345,45.206 cw(c26.695,44.855) 26.695,45.351 cw(c26.695,45.848) U5.J9@26.345,45.497 ; 26.539,45.309 cw(c26.596,45.095) v1@26.767,45.236 ; 26.539,45.393 ccw(c26.596,45.608) v1@26.767,45.466 ; 26.598,45.325 ccw(c26.534,45.566) v1@26.75,45.442 ; 26.598,45.377 cw(c26.534,45.136) v1@26.75,45.261 ; 26.672,45.345 cw(c26.713,45.192) v1@26.836,45.293 ; 26.672,45.357 ccw(c26.713,45.511) v1@26.836,45.41 ; v1@26.779,45.224 ccw(c26.47,44.915) 26.47,45.351 ccw(c26.47,45.787) v1@26.779,45.479
  Bottom Layer w0.089: v1(26.906,45.351) 27.508,45.351 37.694,35.166 Shiel1.44@37.694,30.645 ; v1@27.034,45.224 cw(c27.342,44.915) 27.342,45.351 cw(c27.342,45.787) v1@27.034,45.479 ; Shiel1.44@37.371,31.682 ccw(c36.594,32.46) 37.694,32.46 ccw(c38.793,32.46) Shiel1.44@38.016,31.682 ; Shiel1.44@37.434,31.619 ccw(c36.808,32.245) 37.694,32.245 ccw(c38.579,32.245) Shiel1.44@37.953,31.619 ; Shiel1.44@37.497,31.556 ccw(c37.023,32.031) 37.694,32.031 ccw(c38.364,32.031) Shiel1.44@37.89,31.556